# Altium PCB PCB1.PcbDoc
Units mm, origin at the board's own origin, x right, y up, seen from the top; angles counter-clockwise.
Board outline 40 x 50 mm, 2 copper layers (Top Layer, Bottom Layer); 16 components, 5 nets, 38 pads, 0 vias.
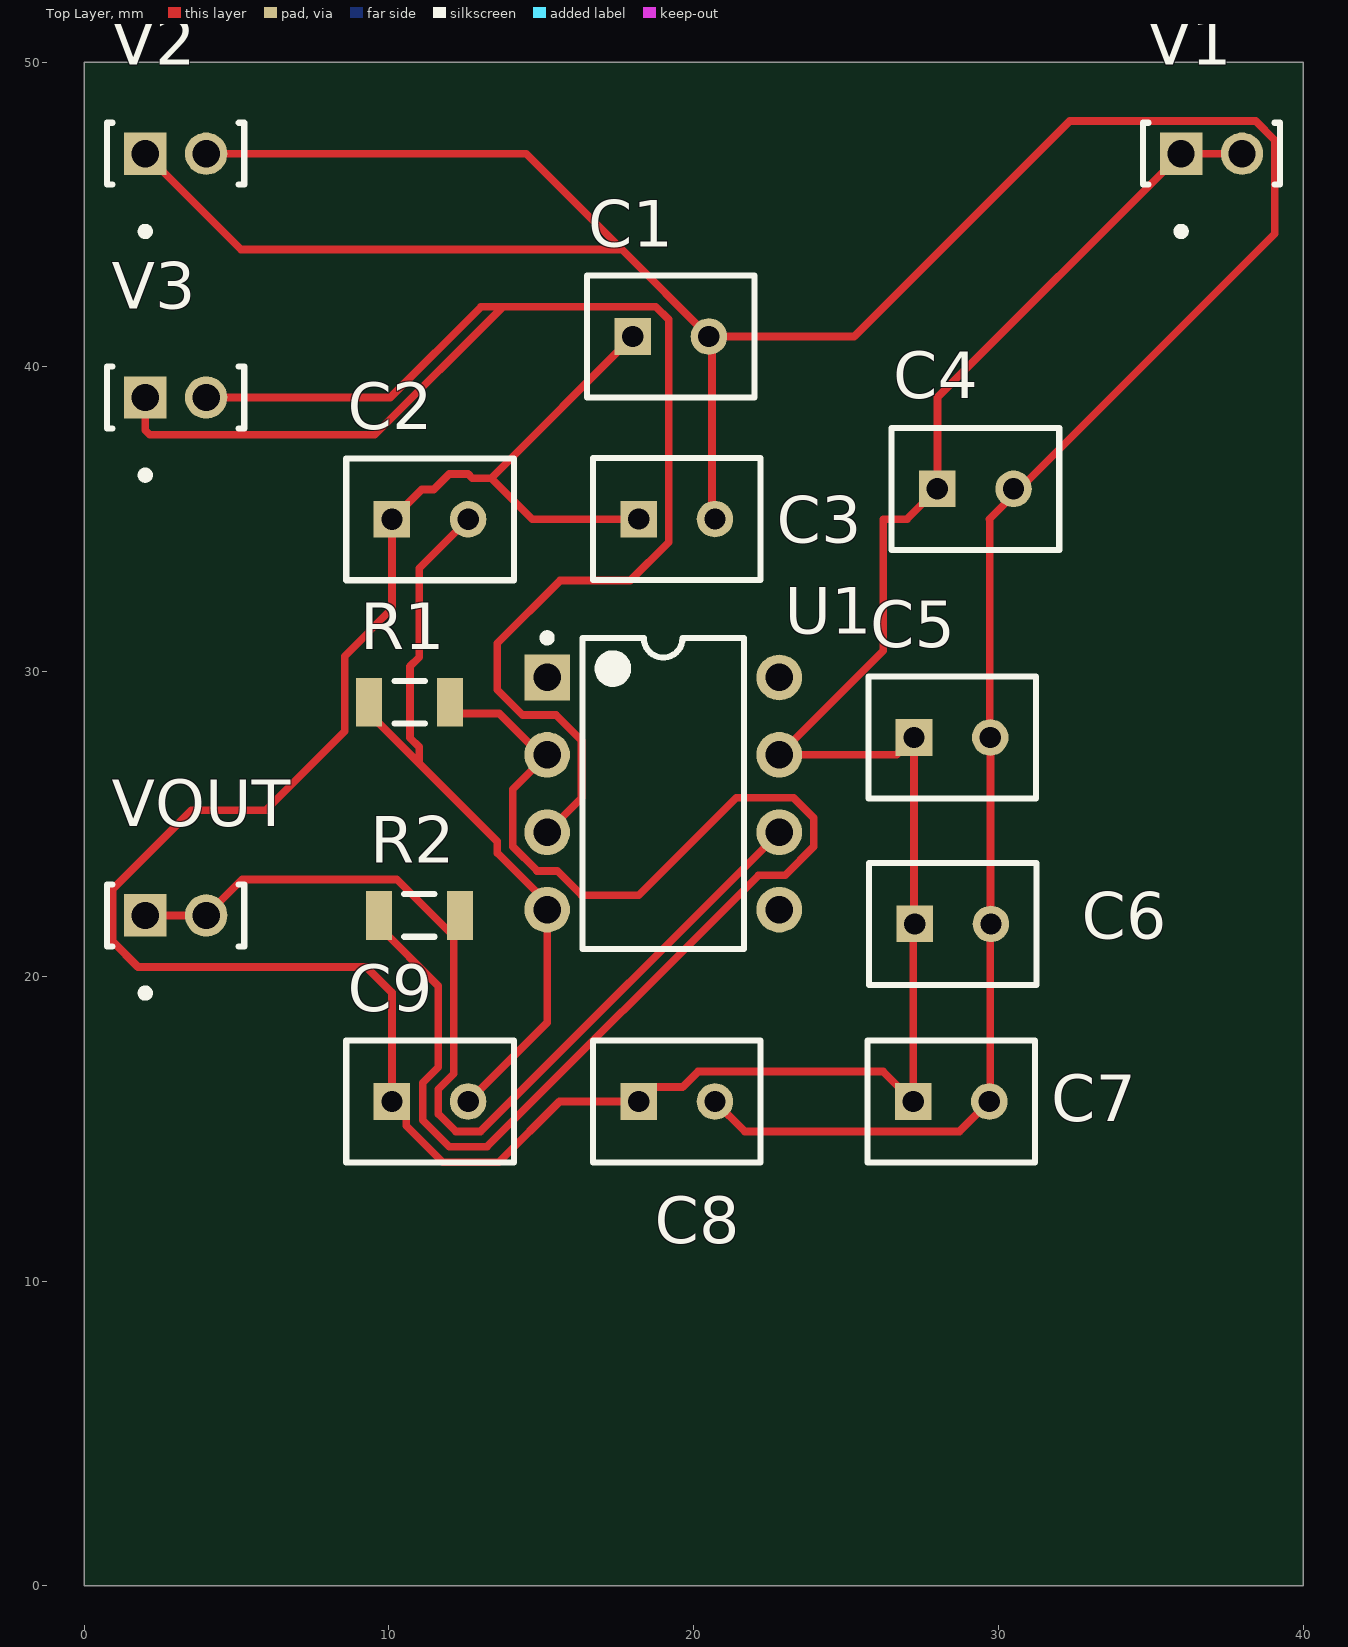
[diagram p0: Top Layer view]
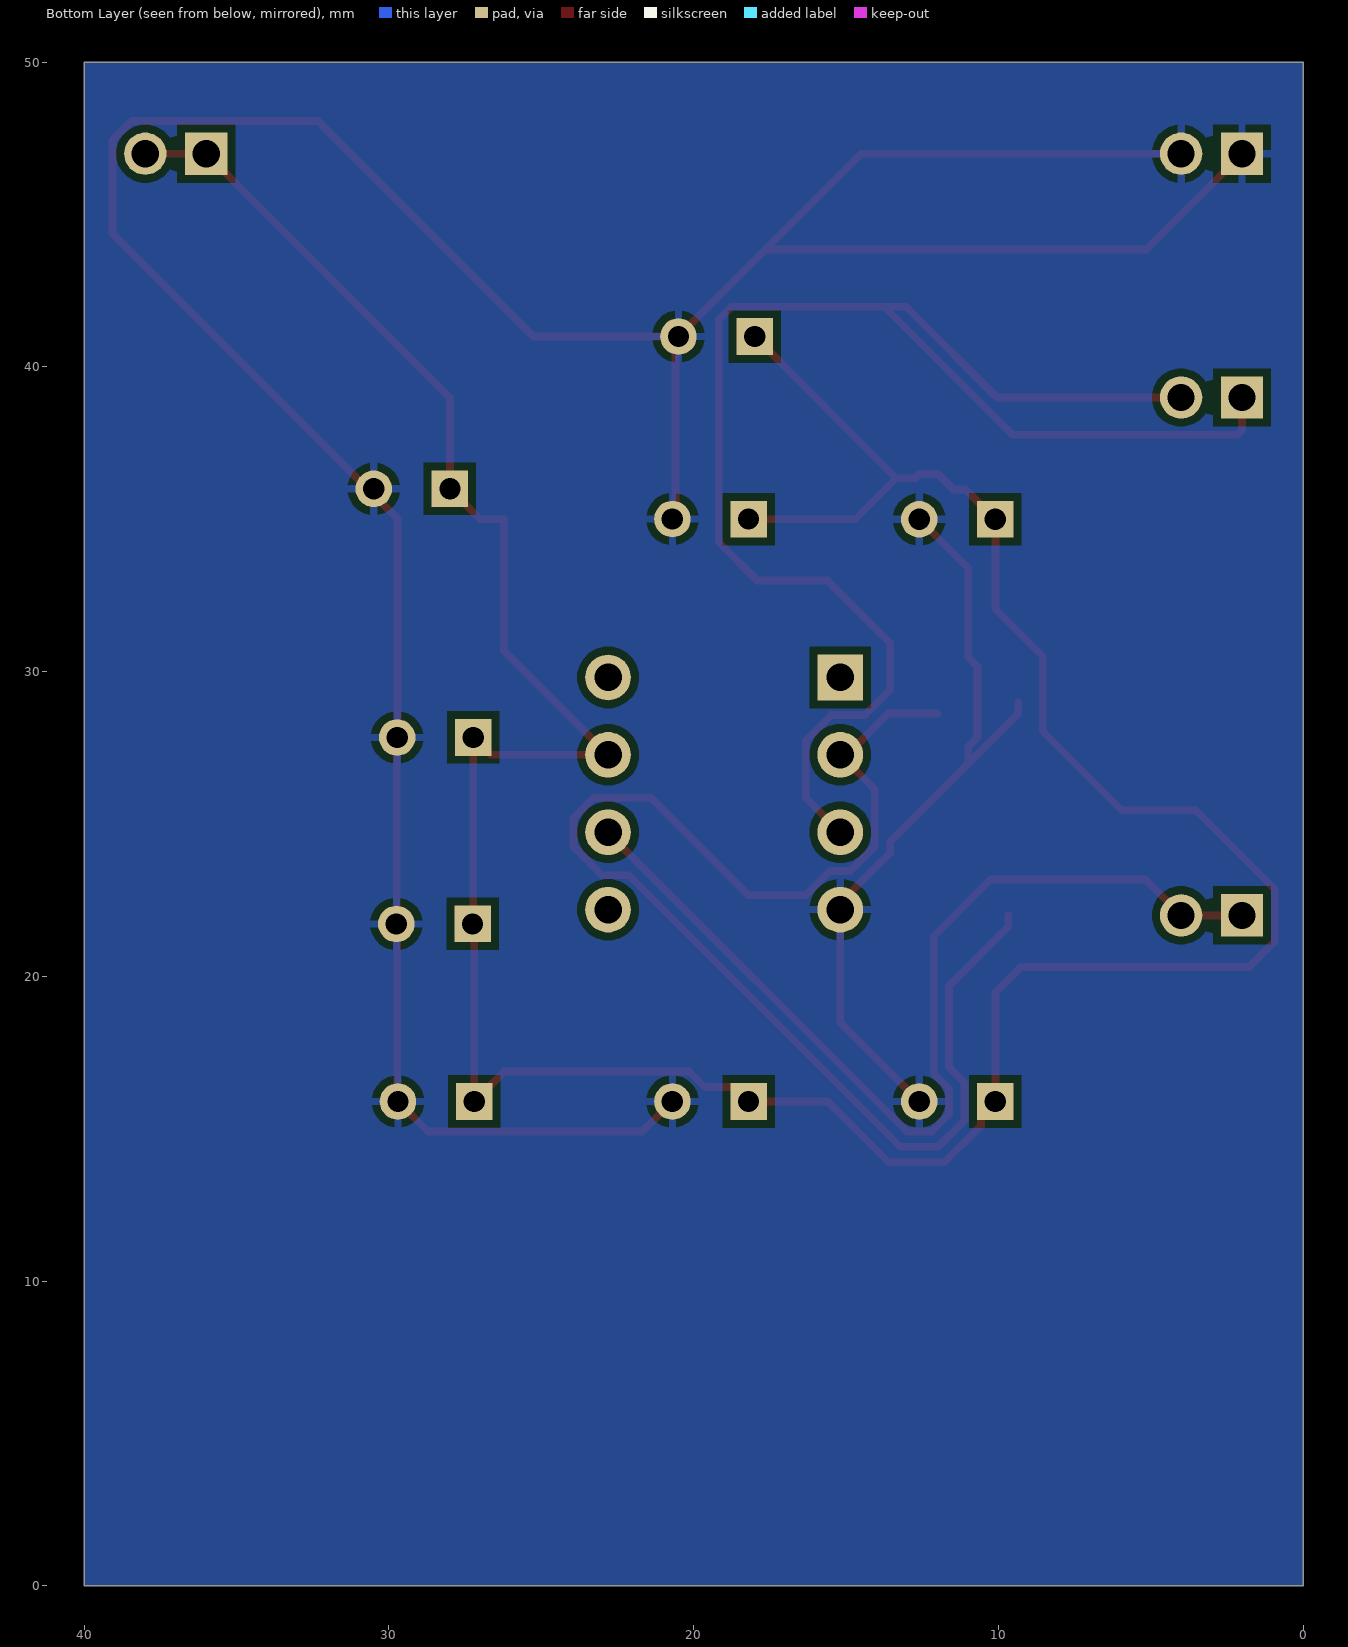
[diagram p1: Bottom Layer view, seen from below]
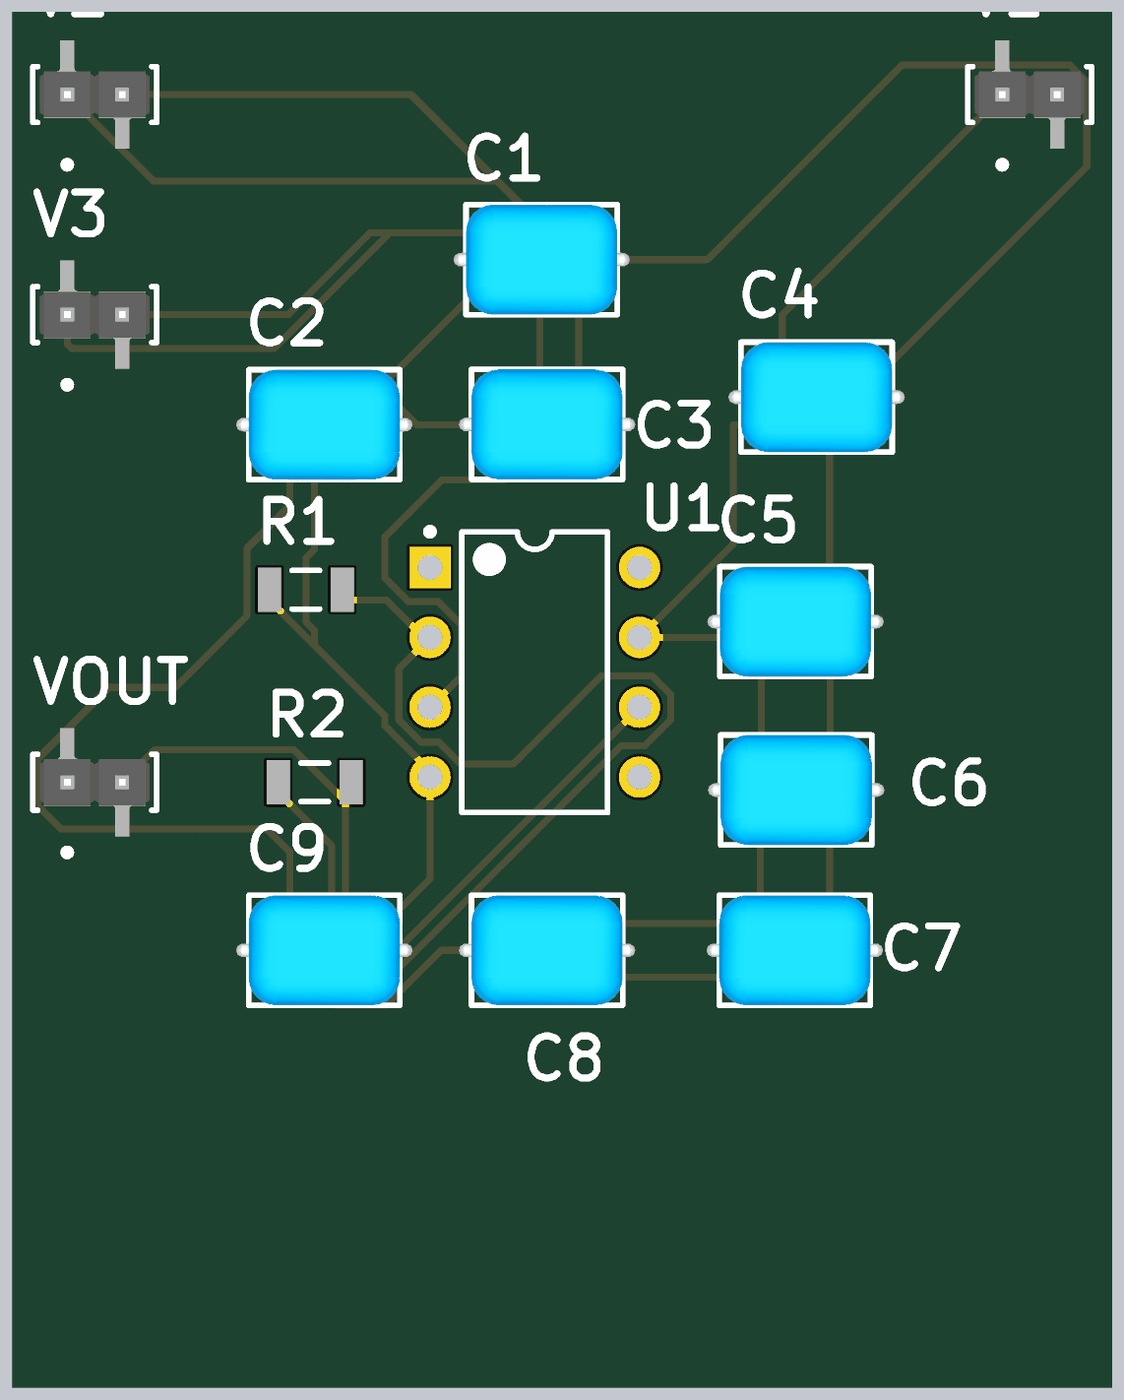
[diagram p2: 3D render of the assembled board from above, using the file's embedded part models]

## Layer stack, top to bottom
Top Solder: solder mask 0.0102, Solder Resist, Dk 3.5
Top Layer: signal copper 0.0356
Dielectric 1: dielectric 0.32, FR-4, Dk 4.8
Bottom Layer: signal copper 0.0356
Bottom Solder: solder mask 0.0102, Solder Resist, Dk 3.5

## Board outline
0,0 0,50 40,50 40,0

## Design rules (kind name [scope] priority, off if disabled: settings)
Clearance [All] p1: gap=0.254 ignorepadtopadclearanceinfootprint=FALSE
PolygonConnect [All] p1: connectstyle=Relief reliefconductorwidth=0.254 reliefentries=4 polygonreliefangle="90 Angle" airgapwidth=0.254
RoutingVias [All] p1: holewidth=0.711 width=1.27 viastyle="Through Hole" minholewidth=0.711 minwidth=1.27 maxholewidth=0.711 maxwidth=1.27
SolderMaskExpansion [All] p1: expansion=0.102 istentingtop=FALSE
SupplyNets "Schematic Supply Nets_1" [InNet('VCC')] p1: voltage=0.000
SupplyNets "Schematic Supply Nets" [InNet('GND')] p2: voltage=0.000
Width [All] p1: maxlimit=0.254 minlimit=0.254 preferedwidth=0.254
30 further rules are at their usual default settings.

## Components (designator, comment, footprint, x,y, rotation, side; value= is the part's Value field where it differs from the comment)
C1 "10u" FP-RDE3S1-MFG 19.25,41 r0 top
C2 "1u" FP-RDE3S1-MFG 11.346,35 r0 top
C3 "0.1u" FP-RDE3S1-MFG 19.448,35.009 r0 top
C4 "0.1u" FP-RDE3S1-MFG 29.25,36 r0 top
C5 "0.1u" FP-RDE3S1-MFG 28.482,27.84 r0 top
C6 "0.1u" FP-RDE3S1-MFG 28.508,21.72 r0 top
C7 "0.01u" FP-RDE3S1-MFG 28.456,15.892 r0 top
C8 "0.01u" FP-RDE3S1-MFG 19.448,15.892 r0 top
C9 "0.01u" FP-RDE3S1-MFG 11.346,15.892 r0 top
R1 "10k" RESC3116X65X40LL10T20 10.675,29 r0 top
R2 "10k" RESC3116X65X40LL10T20 11,22 r0 top
U1 "LM318N" P0008A 19,26 r0 top
V1 "TMM-102-03-T-S" FP-TMM-102-03-T-S-MFG 37,47 r0 top
V2 "TMM-102-03-T-S" FP-TMM-102-03-T-S-MFG 3,47 r0 top
V3 "TMM-102-03-T-S" FP-TMM-102-03-T-S-MFG 3,39 r0 top
VOUT "TMM-102-03-T-S" FP-TMM-102-03-T-S-MFG 3,22 r0 top

## Footprints (in the part's own frame and the unit in brackets; to place one, negate y for a bottom-side part, rotate by r counter-clockwise, add the part's x,y. Pads: shape width x height; smd on the part's side, far side on the other; paste and mask are expansions set on the pad)
FP-RDE3S1-MFG [mm]
  rect 1.2x1.2 hole 0.7: 1(-1.25,0)
  round 1.2 hole 0.7: 2(1.25,0)
  silkscreen extent -2.75,-2 2.75,2, body extent -2.85,-2.1 2.85,2.1, height 0.25
FP-TMM-102-03-T-S-MFG [mm]
  rect 1.39x1.39 hole 0.89 paste-2539.97 mask+0: 1(-1,0)
  round 1.39 hole 0.89 paste-2539.97 mask+0: 2(1,0)
  silkscreen extent -2.25,-2.67 2.25,1.02, body extent -2.1,-2.07 2.1,2.07, height 0.25
P0008A [mm] "DIP, 8-Leads, Body 10.15x6.6mm, Pitch 2.54mm"
  rect 1.5x1.5 hole 0.9: 1(-3.81,3.81)
  round 1.5 hole 0.9: 2(-3.81,1.27) 3(-3.81,-1.27) 4(-3.81,-3.81) 5(3.81,-3.81) 6(3.81,-1.27) 7(3.81,1.27) 8(3.81,3.81)
  silkscreen extent -3.93,-5.1 2.65,5.23, body extent -3.95,-5.07 3.95,5.07, height 5.08
RESC3116X65X40LL10T20 [mm] "Chip Resistor, 2-Leads, Body 3.10x1.60mm, IPC High Density"
  rect 0.85x1.6 smd: 1(-1.325,0) 2(1.325,0)
  silkscreen extent -0.5,-0.7 0.5,0.7, body extent -1.6,-0.85 1.6,0.85, height 0.65

## Part data
C1 C2 C3 C4 C5 C6 C7 C8 C9: library part CMP-00260-148573965-1, "RDEC72A475K3S1H03A", Capacitance=4.7µF, Case/Package=Radial, Max Operating Temperature=125°C, Min Operating Temperature=-55°C, Tolerance=10%, Voltage Rating=100V, Height=7.5mm, Lifecycle Status=Production, Material=Ceramic
R1 R2: library part CMP-2003-04964-1, Manufacturer=Yageo, Part Number=RC1206FR-10750RL
U1: library part CMP-0055-00106-3, "Operational Amplifier, 8-pin MDIP", Manufacturer="Texas Instruments", Package Reference=P0008A, PackageTopMarking=NSUZXYTTE#*LM*318N, PowerWise=N, Code_JEDEC=MS-001-BA, ComponentLink1Description="Datasheet URL", ComponentLink1URL=http://www.ti.com/general/docs/lit/getliterature.tsp?genericPartNumber=LM318-N&fileType=pdf, CompType=Amplifiers, PackageDescription="MDIP, .365 x .250 x .130in, 8 Lead, .100in Pitch", PinCount=8, RoHS=N
V1 V2 V3 VOUT: library part CMP-02766-001621-1, "CONN HEADER VERT 2POS 2MM", Color=Black, Max Current Rating=3.9A, Max Operating Temperature=105°C, Max Voltage Rating (AC)=500V, Min Operating Temperature=-55°C, Package Quantity=1, Connector Type=Header, Contact Finish - Mating=TIN, Contact Material=Bronze, Contact Mating Length=0.157inch, Contact Plating=Tin, Contact Shape=Square, Contact Type="Male Pin", Depth=1.97mm, Fastening Type=Pull, Gender=Male, Housing Color=Black, Housing Material=Polymer, Insulation Color=Black, Insulation Material=Polymer, Lead Free="Lead Free", Length=4mm, Mount="Through Hole", Number of Contacts=2, Number of Positions=2, Number of Rows=1, Orientation=Straight, Packaging=Bulk, Pitch=2mm, Radiation Hardening=No, REACH SVHC="No SVHC", RoHS Compliant=Yes, Series=TMM, Termination=Solder

## Nets (pads, with @x,y where several pads share a name; then routed paths per layer and width w, separated by ;. In a path a pad name is that pad's centre, name@x,y a point inside that pad or via, vN(x,y) a via of type N, cw(c..) or ccw(c..) an arc to the next point about the centre after c; other vN are vias at no path point)
GND: C1.2 C2.2 C3.2 C4.2 C5.2 C6.2 C7.2 C8.2 C9.2 R1.1 U1.4 V2.1 V2.2 | length 134.5
  Top Layer w0.254: V2.1 5.14,43.86 17.64,43.86 ; V2.2 14.5,47 17.64,43.86 ; R1.1 9.35,28.625 10.989,26.986 ; C9.2 15.19,18.485 15.19,22.412 13.551,24.051 13.551,24.424 10.989,26.986 ; C2.2 10.989,33.393 10.989,30.471 10.686,30.168 10.686,27.832 10.989,27.529 10.989,26.986 ; C1.2@20.599,41 25.266,41 32.342,48.076 38.446,48.076 39.076,47.446 39.076,44.37 29.706,35 29.719,34.987 29.719,27.853 C5.2 29.745,27.827 29.745,21.733 C6.2 29.732,21.694 29.732,15.918 C7.2 28.725,14.911 21.679,14.911 C8.2 ; C3.2 20.599,35.108 20.599,40.901 C1.2 17.64,43.86
NetR1_2: R1.2 R2.1 U1.2 | length 45.2
  Top Layer w0.254: R2.1 9.675,21.625 11.615,19.685 11.615,17.016 11.107,16.508 11.107,15.275 11.98,14.403 13.213,14.403 22.132,23.321 23,23.321 23.941,24.262 23.941,25.198 23.278,25.861 21.401,25.861 18.198,22.658 16.321,22.658 15.519,23.46 14.861,23.46 14.059,24.262 14.059,26.139 14.783,26.863 U1.2@14.783,27.169 ; R1.2@12,28.625 13.618,28.625 14.682,27.561 14.682,27.27 14.783,27.27 U1.2
NetR2_2: R2.2 U1.6 VOUT.1 VOUT.2 | length 32.9
  Top Layer w0.254: VOUT.1 VOUT.2 5.181,23.181 10.258,23.181 12.123,21.315 12.123,16.806 11.615,16.298 11.615,15.485 12.19,14.911 13.003,14.911 22.81,24.718 U1.6
NetU1_3: U1.3 V3.1 V3.2 | length 54
  Top Layer w0.254: V3.1 2,37.924 2.149,37.775 9.536,37.775 13.742,41.981 ; V3.2 10.042,39 13.023,41.981 13.742,41.981 ; U1.3 16.321,25.861 16.321,27.738 15.485,28.574 14.387,28.574 13.551,29.41 13.551,30.928 15.615,32.992 17.92,32.992 19.179,34.251 19.179,41.56 18.758,41.981 13.742,41.981
VCC: C1.1 C2.1 C3.1 C4.1 C5.1 C6.1 C7.1 C8.1 C9.1 U1.7 V1.1 V1.2 | length 112.5
  Top Layer w0.254: C1.1 13.351,36.351 ; C3.1 18.189,35 14.702,35 13.351,36.351 ; V1.2 V1.1 28,39 C4.1 27,35 26.225,35 26.225,30.685 U1.7 26.662,27.27 C5.1 27.232,21.746 C6.1 27.206,21.668 C7.1 26.225,16.873 20.142,16.873 19.634,16.365 18.671,16.365 C8.1 15.597,15.892 13.6,13.895 11.769,13.895 10.569,15.094 10.569,15.419 C9.1 10.096,19.469 9.257,20.308 1.763,20.308 0.924,21.147 0.924,22.853 3.519,25.448 5.949,25.448 8.544,28.042 8.544,30.508 10.096,32.061 C2.1 11.077,35.981 11.472,35.981 11.98,36.489 12.596,36.489 12.734,36.351 13.351,36.351
pads on no net: U1.1 U1.5 U1.8

## Polygon pours and split planes (outlines as drawn)
GND on Bottom Layer "GND_L02_P000" (solid, remove dead copper, pour order 0): 0,0 40,0 40,50 0,50

## Silkscreen, mask and mechanical layers (free items; w line width, h text height)
Mechanical 1:
  the board outline again, w0.254